# Altium PCB PCB_V1.0.PcbDoc
Units mil, origin at the board's own origin, x right, y up, seen from the top; angles counter-clockwise.
Board outline 2200 x 895 mil, 2 copper layers (Top Layer, Bottom Layer), stack 38.189 mil thick; 16 components, 16 nets, 53 pads, 4 vias.
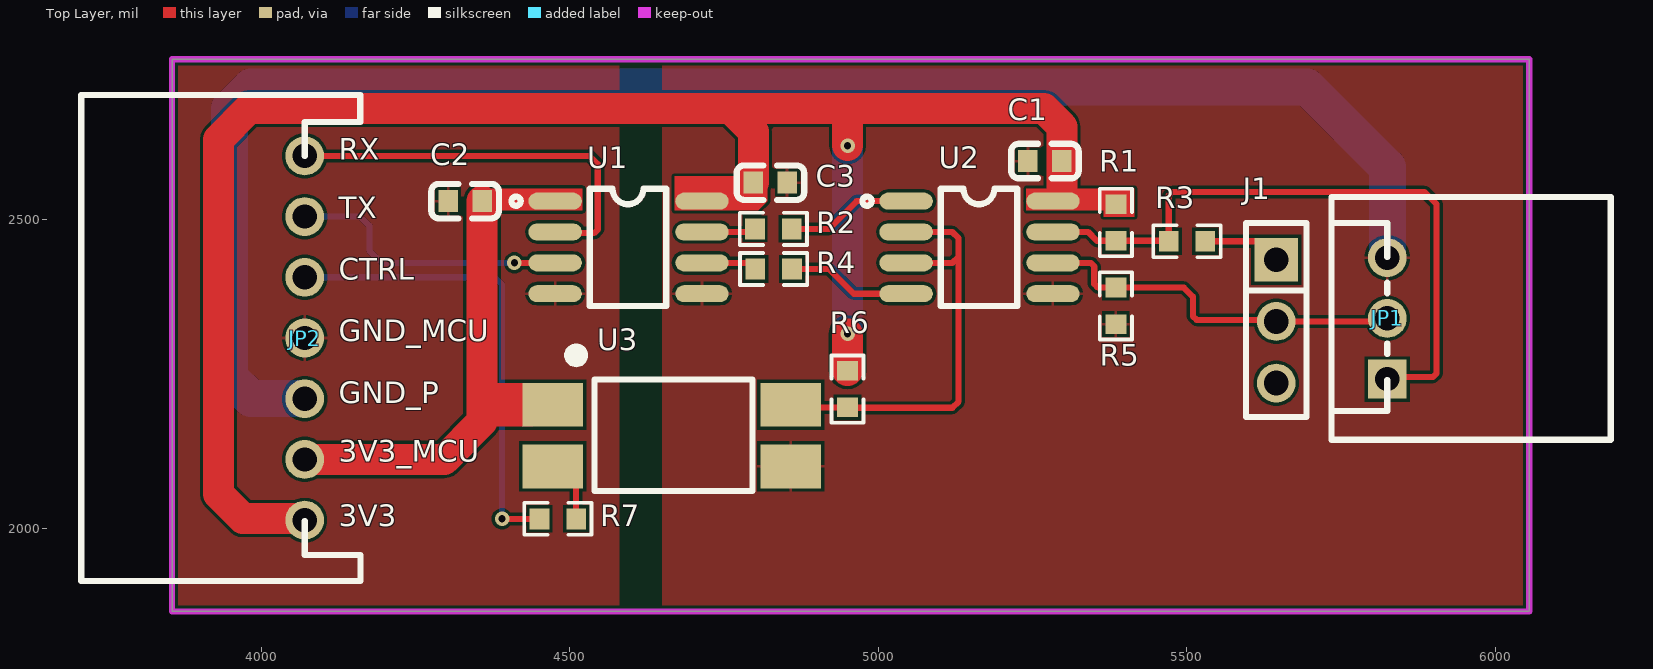
[diagram p0: Top Layer view]
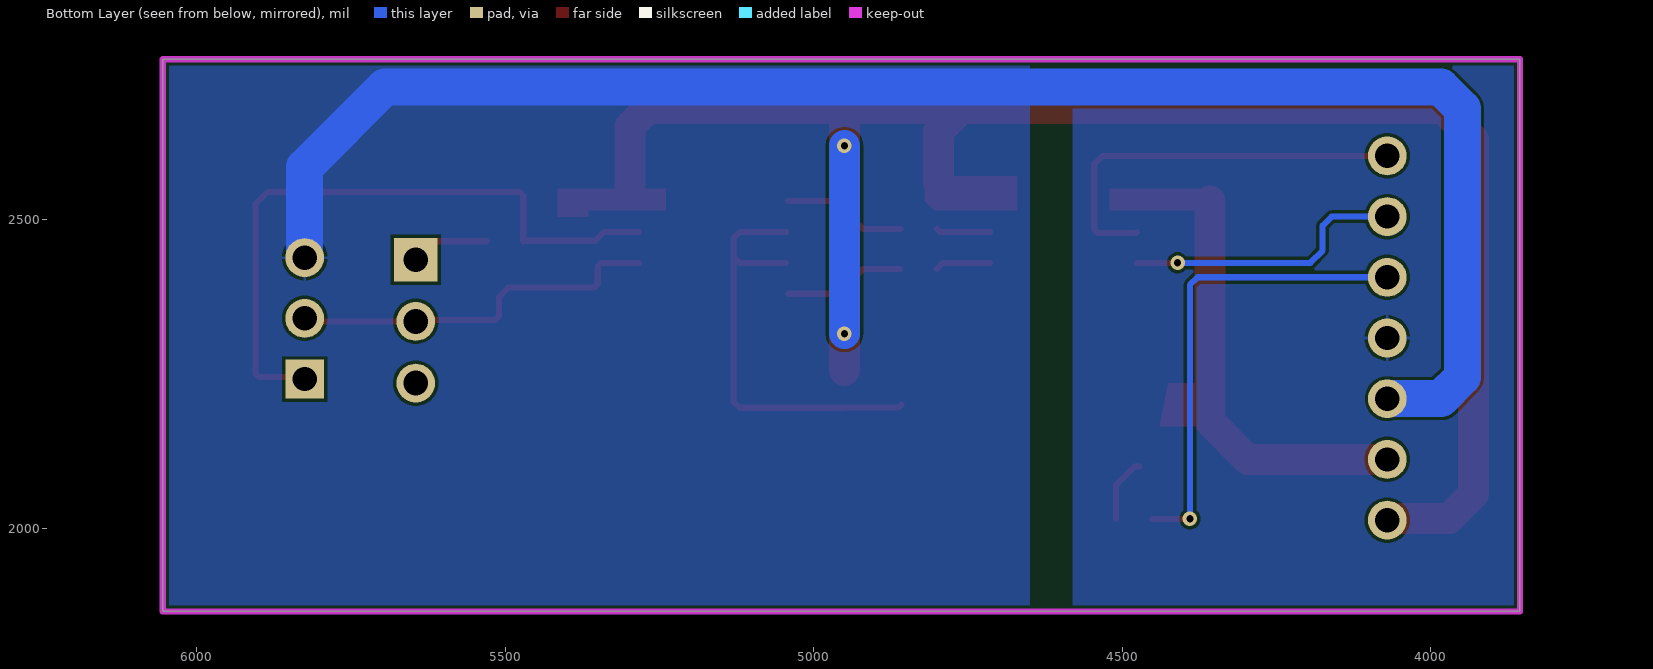
[diagram p1: Bottom Layer view, seen from below]
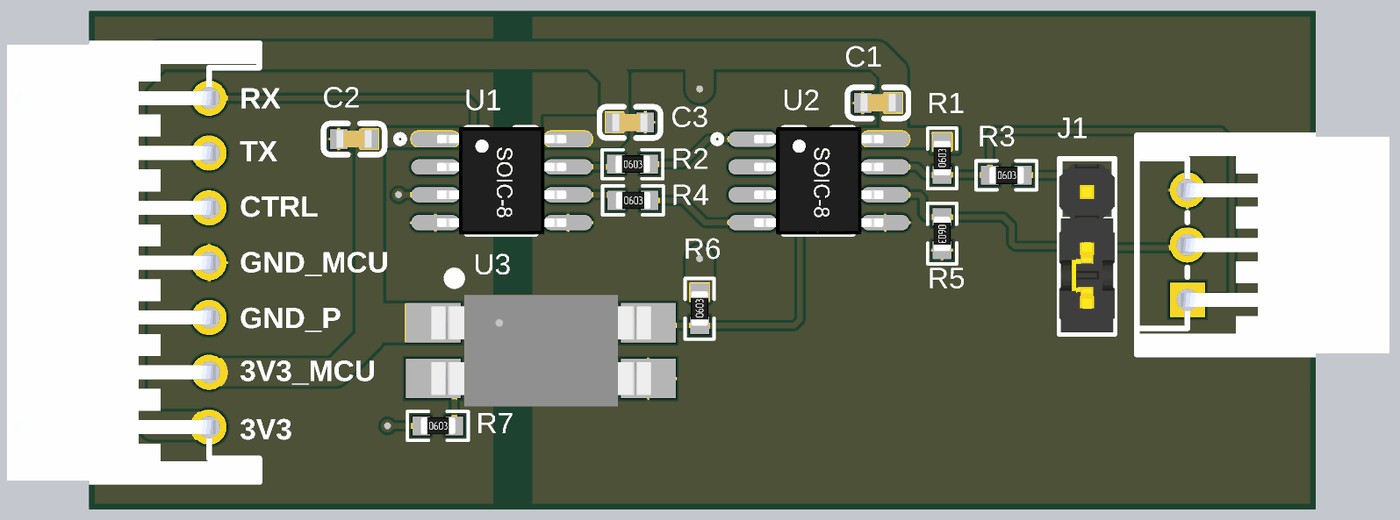
[diagram p2: 3D render of the assembled board from above, using the file's embedded part models]

## Layer stack, top to bottom
Top Solder: solder mask 0.5, Solder Resist, Dk 3.8
Top Layer: signal copper 1.378
Dielectric 1: core 35.433, FR-4, Dk 4.5
Bottom Layer: signal copper 1.378
Bottom Solder: solder mask 0.5, Solder Resist, Dk 3.8

## Board outline
3855,1865 3855,2760 6055,2760 6055,1865

## Design rules (kind name [scope] priority, off if disabled: settings)
BoardOutlineClearance [All] p1: gap=7.87 ignorepadtopadclearanceinfootprint=FALSE
Clearance [All] p1: gap=5 ignorepadtopadclearanceinfootprint=FALSE except(9.84: Arc-Hole Track-Hole SMDPad-Hole THPad-Hole Via-Hole Fill-Hole Poly-Hole Region-Hole Text-Hole)
ComponentClearance [All] p1: gap=5 collisioncheckmode=3 verticalgap=5 showdistances=TRUE
DiffPairsRouting [All] p1: maxlimit=10 minlimit=5 mostfreqgap=5 toplayer_minwidth=5 toplayer_maxwidth=1000 toplayer_prefwidth=5 bottomlayer_minwidth=5 bottomlayer_maxwidth=1000 bottomlayer_prefwidth=5 maxuncoupledlength=500
Height [All] p1: minheight=0 maxheight=71497.94 prefheight=500
HoleSize [All] p1: absolutevalues=TRUE maxlimit=248.03 minlimit=11.81 maxpercent=80.000 minpercent=20.000
HoleToHoleClearance [All] p1: gap=9.84 allowstackedmicrovias=FALSE
MinimumAnnularRing [All] p1: minimumring=3
MinimumSolderMaskSliver [All] p1: minsoldermaskwidth=0
PlaneClearance [All] p1: clearance=5
PlaneConnect PlaneConnectPowerPads [InPadClass('PowerPads')] p1: planeconnectstyle=Direct reliefexpansion=20 reliefentries=4 reliefconductorwidth=10 reliefairgap=10
PlaneConnect [All] p2: pad.planeconnectstyle=Relief pad.reliefexpansion=11.81 pad.reliefentries=4 pad.reliefconductorwidth=5 pad.reliefairgap=5 via.planeconnectstyle=Direct via.reliefexpansion=11.81 via.reliefentries=4 via.reliefconductorwidth=5 via.reliefairgap=5
PolygonConnect PolygonConnectPowerPads [All vs (InPadClass('PowerPads'))] p1: connectstyle=Direct reliefconductorwidth=10 reliefentries=4 polygonreliefangle="90 Angle" airgapwidth=10
PolygonConnect [All] p2: thpad.connectstyle=Relief thpad.reliefconductorwidth=5 thpad.reliefentries=4 thpad.polygonreliefangle="90 Angle" thpad.airgapwidth=5 smdpad.connectstyle=Relief smdpad.reliefconductorwidth=5 smdpad.reliefentries=4 smdpad.polygonreliefangle="90 Angle" smdpad.airgapwidth=5 via.connectstyle=Direct via.reliefconductorwidth=5 via.reliefentries=4 via.polygonreliefangle="90 Angle" via.airgapwidth=5
RoutingVias [All] p1: holewidth=11.81 width=23.62 viastyle="Through Hole" minholewidth=11.81 minwidth=23.62 maxholewidth=23.62 maxwidth=259.84
SilkToSilkClearance [All] p1: silktosilkclearance=0
SilkToSolderMaskClearance [IsPad] p1: minsilkscreentomaskgap=5 clearancetoexposedcopper=TRUE
SolderMaskExpansion [All] p1: expansion=2.95 istentingtop=FALSE
Width [All] p1: maxlimit=1000 minlimit=5 preferedwidth=5 minimp=50.000000 maximp=50.000000 favimp=50.000000
20 further rules are at their usual default settings.

## Classes and differential pairs
polygon class GND_MCU: GND_MCU_L01_P000 GND_MCU_L02_P001
component class Schematic: C1 C3 J1 JP2 R1 R2 R4 R5 R6 R7 U1 U3
differential pair NewDifferentialPair2: +NetR2_2 -NetR4_2
differential pair NewDifferentialPair1: +NetR2_1 -NetR4_1

## Components (designator, comment, footprint, x,y, rotation, side; value= is the part's Value field where it differs from the comment)
C1 "1uF" C0603 5270,2595 r0 top
C2 "1uF" C0603 4330,2530 r0 top
C3 "1uF" C0603 4825,2560 r180 top
J1 "JUMPER" JUMPER_SHUNT_3P 5645,2435 r270 top
JP1 "1x3P, Male" "JST S3B-XH-A(LF)(SN)" 5825,2340 r270 top
JP2 "1x7P, Male" S7B-XH-A(LF)(SN) 4070,2308.16 r90 top
R1 "2.2kΩ" R0603 5411.01,2440.81 r90 top
R2 "120Ω" R0603 4775.12,2458.99 r0 top
R3 "120Ω" R0603 5445.81,2438.99 r0 top
R4 "120Ω" R0603 4775.81,2393.99 r0 top
R5 "2.2kΩ" R0603 5358.99,2414.88 r270 top
R6 "10kΩ" R0603 4976.01,2170.81 r90 top
R7 "330Ω" R0603 4425.81,1988.99 r0 top
U1 "ISO7721DR_SOIC8" SOIC-8 4595,2455 r0 top
U2 "SP3485EN_SOIC8" SOIC-8 5164,2455 r0 top
U3 "PC817CS" SOP-4 4665,2150 r270 top

## Footprints (in the part's own frame and the unit in brackets; to place one, negate y for a bottom-side part, rotate by r counter-clockwise, add the part's x,y. Pads: shape width x height; smd on the part's side, far side on the other; paste and mask are expansions set on the pad)
C0603 [mm]
  rect 0.8x0.9 smd paste+0 mask+0.051: 1(-0.7,0) 2(0.7,0)
  silkscreen extent -1.39,-0.71 1.39,0.71, body extent -0.8,-0.39 0.8,0.41, height 0.8
"JST S3B-XH-A(LF)(SN)" [mm]
  rect 1.6x1.6 hole 1 paste-2539.97 mask+0.051: 1(2.5,0)
  round 1.6 hole 1 paste-2539.97 mask+0.051: 2(0,0) 3(-2.5,0)
  silkscreen extent -5,-2.3 5,9.2, body extent -4.95,-2.28 4.95,9.22, height 6.1
JUMPER_SHUNT_3P [mm]
  rect 1.8x1.8 hole 1.02 paste-2539.97 mask+0.051: 1(0,0)
  round 1.6 hole 1.02 paste-2539.97 mask+0.051: 2(2.54,0) 3(5.08,0)
  silkscreen extent -1.52,-1.25 6.48,1.25, body extent -1.27,-1.27 6.41,1.27, height 8.6
R0603 [mil]
  rect 31.75x34.02 smd paste+0 mask+2: 1(24.88,26.01) 2(84.19,26.01)
  silkscreen extent 0,0 109,52, body extent 24,10 86,42, height 18
S7B-XH-A(LF)(SN) [mm]
  round 1.6 hole 1 paste-2539.97 mask+0.051: 1(7.5,0) 2(5,0) 3(2.5,0) 4(0,0) 5(-2.5,0) 6(-5,0) 7(-7.5,0)
  silkscreen extent -10,-2.3 10,9.2, body extent -9.95,-2.28 9.95,9.22, height 6.15
SOIC-8 [mm]
  oval 2.2x0.7 smd paste+0 mask+0.051: 1(-3.023,1.905) 2(-3.023,0.635) 3(-3.023,-0.635) 4(-3.023,-1.905) 5(3.023,-1.905) 6(3.023,-0.635) 7(3.023,0.635) 8(3.023,1.905)
  silkscreen extent -4.82,-2.41 1.55,2.41, body extent -2.95,-2.45 2.95,2.45, height 1.52
SOP-4 [mm]
  rect 1.8x2.5 smd paste+0 mask+0.051: 1(-1.27,-4.9) 2(1.27,-4.9) 3(1.27,4.9) 4(-1.27,4.9)
  silkscreen extent -3.79,-4.42 2.29,3.32, body extent -2.54,-4.99 2.54,5.02, height 4.6

## Part data
C1 C2 C3: library part C0603_MLCC_1uF_X7R_50V, "50V 1uF X7R ±10% 0603 Multilayer Ceramic Capacitors MLCC - SMD/SMT ROHS", LCSC Part=C559769, Manufacturer=YAGEO, Mfr. Part=CC0603KRX7R9BB105, Package=0603, Temperature Coefficient="X7R, 50V", Tolerance=±10%, Voltage Rating=50V, Capacitance=1uF, Link=https://www.lcsc.com/product-detail/C559769.html
J1: library part JUMPER_SHUNT_3P, "250V 3A Through Hole Pin Header 2.5mm 3P 6mm -40℃~+105℃ 3mm 2.54mm 1 Black 1x3P Through Hole,P=2.54mm Pin Headers ROHS", LCSC Part=C2937625, Manufacturer=XFCN, Mfr. Part=PZ254V-11-03P, Package="Through Hole,P=2.54mm", Insulation Height="Insulation Height", Link=https://www.lcsc.com/product-detail/C2937625.html, Number of Rows=1, Pin Structure=1x3P
JP1: library part "JST S3B-XH-A(LF)(SN)", "3P 1x3P XH Tin -25℃~+85℃ White 2.5mm 250V 3 3A 1 Right Angle Through Hole,Right Angle,P=2.5mm Headers, Male Pins ROHS", Current Rating-Power=3A, LCSC Part=C157928, Manufacturer=JST, Mfr. Part=S3B-XH-A(LF)(SN), Package="Through Hole,Right Angle,P=2.5mm", Link=https://www.lcsc.com/product-detail/C157928.html?s_z=n_S3B-XH-A-E%28LF%29%28SN%29
JP2: library part "JST S7B-XH-A(LF)(SN)", "7P 1x7P XH Tin -25℃~+85℃ White 2.5mm 250V 7 3A 1 Right Angle Through Hole,Right Angle,P=2.5mm Headers, Male Pins ROHS", Current Rating-Power=3A, LCSC Part=C157916, Manufacturer=JST, Mfr. Part=S7B-XH-A(LF)(SN), Package="Through Hole,Right Angle,P=2.5mm", Link=https://www.lcsc.com/product-detail/C157916.html?s_z=n_S7B-XH-A%28LF%29%28SN%29
R1 R5: library part R0603_2.2KΩ_±1%, "100mW 2.2kΩ 75V ±100ppm/℃ Thick Film Resistor ±1% 0603 Chip Resistor - Surface Mount ROHS", LCSC Part=C114662, Manufacturer=YAGEO, Mfr. Part=RC0603FR-072K2L, Operating Temperature=-55℃~+155℃, Package=0603, Tolerance=±1%, Link=https://www.lcsc.com/product-detail/C114662.html?s_z=n_2.2K%2520ohm, Resistance=2.2kΩ
R2 R3 R4: library part R0603_120Ω_±1%, "100mW 120Ω 75V ±100ppm/℃ Thick Film Resistor ±1% 0603 Chip Resistor - Surface Mount ROHS", LCSC Part=C114640, Manufacturer=YAGEO, Mfr. Part=RC0603FR-07120RL, Operating Temperature=-55℃~+155℃, Package=0603, Tolerance=±1%, Link=https://www.lcsc.com/product-detail/C114640.html?s_z=n_120%2520OHM, Resistance=120Ω
R6: library part R0603_10kΩ_±1%, "100mW Thick Film Resistor 75V ±100ppm/℃ ±1% 10kΩ 0603 Chip Resistor - Surface Mount ROHS", LCSC Part=C98220, Manufacturer=YAGEO, Mfr. Part=RC0603FR-0710KL, Operating Temperature=-55℃~+155℃, Package=0603, Tolerance=±1%, Link=https://www.lcsc.com/product-detail/C98220.html, Resistance=10kΩ
R7: library part R0603_330Ω_±1%, "100mW Thick Film Resistor 75V ±100ppm/℃ ±1% 330Ω 0603 Chip Resistor - Surface Mount ROHS", LCSC Part=C105881, Manufacturer=YAGEO, Mfr. Part=RC0603FR-07330RL, Operating Temperature=-55℃~+155℃, Package=0603, Tolerance=±1%, Link=https://www.lcsc.com/product-detail/C105881.html, Resistance=330Ω
U1: "100Mbps SOIC-8 Digital Isolators ROHS", LCSC Part=C366164, Manufacturer=TI, Mfr. Part=ISO7721DR, Operating Temperature=-55℃~+125℃, Package=SOIC-8, Voltage - Supply="2.25V~5.5V; 2.25V~5.5V", Data Rate=100Mbps, Default Output="High Level", Link=https://www.lcsc.com/product-detail/C366164.html?s_z=n_ISO7721DR, Number of Forward Channels=1
U2: library part SP3485EN-L/TR_SOIC8, "Transceiver 32 Half-Duplex 3.3V SOIC-8 Drivers, Receivers, Transceivers ROHS", LCSC Part=C8963, Manufacturer=MaxLinear, Mfr. Part=SP3485EN-L/TR, Operating Temperature=-40℃~+85℃, Package=SOIC-8, Voltage - Supply=3.3V, Link=https://www.lcsc.com/product-detail/C8963.html?s_z=n_SP3485
U3: "50mA 200mV@1mA,20mA 80V 6V 1.2V DC SOP-4 Transistor, Photovoltaic Output Optoisolators ROHS", LCSC Part=C20612591, Manufacturer=AOTE, Package=SOP-4, Category="Isolators/Optocouplers, Optoisolators/Transistor, Photovoltaic Output Optoisolators", Key Attributes="OPTOISOLATOR 5kV 1CH TRANS SOP-4", Link=https://www.lcsc.com/product-detail/C20612591.html?s_z=n_pc817, Mfr. Part=PC817CS

## Via types
v1: diameter 23.62, hole 11.81, Top Layer to Bottom Layer, tented both sides, 4 vias

## Nets (pads, with @x,y where several pads share a name; then routed paths per layer and width w, separated by ;. In a path a pad name is that pad's centre, name@x,y a point inside that pad or via, vN(x,y) a via of type N, cw(c..) or ccw(c..) an arc to the next point about the centre after c; other vN are vias at no path point)
3V3: C1.2 C3.2 JP2.7 R1.2 R6.2 U1.8 U2.8 | length 2786.2
  Top Layer w50: JP2.7 4067.51,2015.37 3969.63,2015.37 3930,2055 3930,2630 3980,2680 4760,2680 ; C3.2 4797.44,2642.55 4760,2680 ; R6.2 v1(4950,2315) ; v1(4950,2620) 4950,2662.13 ; U2.8@5297.56,2540 C1.2 5297.56,2650.71 5268.27,2680 4760,2680
  Bottom Layer w50: v1(4950,2315) v1(4950,2620)
3V3_MCU: C2.2 JP2.6 U1.1 U3.1 | length 670.4
  Top Layer w50: JP2.6 4296.3,2111.3 4357.56,2172.55 C2.2
CONTROL: R6.1 U2.2 U2.3 U3.4 | length 721.6
  Top Layer w10: U3.4 4862.22,2195.69 R6.1 4950.69,2195 5120,2195 5130,2205 5130,2440 ; U2.3 5120,2430 5130,2440 ; U2.2 5120,2480 5130,2470 5130,2440
GND_MCU: C2.1 JP2.4 U1.4
GND_P: C1.1 C3.1 JP1.3 JP2.5 R5.2 U1.5 U2.5 U3.3 | length 2663.4
  Bottom Layer w60: JP2.5 3983.22,2209.73 3948.07,2244.88 3948.07,2679.85 3983.22,2715 5695,2715 5825,2585 JP1.3
MCU_CTRL: JP2.3 R7.1 | length 765
  Top Layer w10: v1(4390,2015) R7.1
  Bottom Layer w10: JP2.3 4377.56,2406.58 4390,2394.14 v1(4390,2015)
MCU_RX: JP2.1 U1.2 | length 658.8
  Top Layer w10: JP2.1 4531.57,2603.43 4545,2590 4545,2483.97 4539.14,2478.11 4477.89,2478.11 U1.2
MCU_TX: JP2.2 U1.3 | length 460.5
  Top Layer w10: v1(4410,2430) U1.3
  Bottom Layer w10: JP2.2 4160,2505 4175,2490 4175,2450 4195,2430 v1(4410,2430)
NetJ1_1: J1.1 R3.2 | length 127.4
  Top Layer w10: R3.2 5615,2465 J1.1
NetJ1_2: J1.2 JP1.2 R5.1 U2.6 | length 620
  Top Layer w10: U2.6 5344.14,2430 5350,2424.14 5350,2395.86 5355.86,2390 5495,2390 5510,2375 5510,2343.36 5515.86,2337.5 J1.2@5647.5,2337.5 ; J1.2 5819.99,2335 JP1.2
NetJP1_1: JP1.1 R1.1 R3.1 U2.7 | length 1071.1
  Top Layer w10: U2.7 5340,2480 5354.31,2465.69 R1.1 5470,2465.69 R3.1 5470.69,2539.14 5476.55,2545 5885,2545 5905,2525 5905,2250.86 5899.14,2245 5828.43,2245 JP1.1
NetR2_1: R2.1 U1.7 | length 88.1
  Top Layer w10: U1.7 4795,2480 R2.1
NetR2_2: R2.2 U2.1 | length 200.3
  Top Layer w10: R2.2 4920,2485 4965,2530 U2.1@5041,2530
NetR4_1: R4.1 U1.6 | length 90.8
  Top Layer w10: U1.6 4790.69,2430 R4.1
NetR4_2: R4.2 U2.4 | length 197.6
  Top Layer w10: R4.2 4920,2420 4960,2380 U2.4@5041,2380
NetR7_2: R7.2 U3.2 | length 105.1
  Top Layer w10: U3.2 4479.57,2100 4510,2069.57 R7.2
pads on no net: J1.3

## Polygon pours and split planes (outlines as drawn)
GND_P on Top Layer "GND_P_L01_P002" (solid, remove dead copper, pour order 2): 4650,1865 4650,2760 6055,2760 6055,1865
GND_MCU on Top Layer "GND_MCU_L01_P000" (solid, remove dead copper, pour order 0): 3855,1865 3855,2760 4580,2760 4580,1865
GND_P on Bottom Layer "GND_P_L02_P003" (solid, remove dead copper, pour order 3): 4650,1865 4650,2760 6055,2760 6055,1865
GND_MCU on Bottom Layer "GND_MCU_L02_P001" (solid, remove dead copper, pour order 1): 3855,1865 3855,2760 4580,2760 4580,1865

## Keep-outs
Keep-Out Layer:
  the board outline again, w10

## Other copper
Top Layer:
  region net 3V3: 5365,2515 5365,2505 5415,2505 5415,2517.63
  region net 3V3: 5240,2550 5240,2515 5415,2515 5415,2550
  region net 3V3: 4670,2515 4805,2515 4820,2530 4820,2570 4670,2570
  region net 3V3_MCU: 4520,2550 4350,2550 4350,2515 4520,2515
  region net 3V3_MCU: 4425,2235 4365,2235 4365,2165 4439,2165

## Silkscreen, mask and mechanical layers (free items; w line width, h text height)
Top Overlay:
  text "RX" at 4125,2585 h60
  text "TX" at 4125,2490 h60
  text "CTRL" at 4125,2390.67 h60
  text "GND_MCU" at 4125,2290.6 h60
  text "GND_P" at 4125,2190.6 h60
  text "3V3_MCU" at 4125,2095.6 h60
  text "3V3" at 4125,1990.72 h60